# EAGLE board CC-16-2 ADIS16209 breakout (EAGLE 9.2.2)
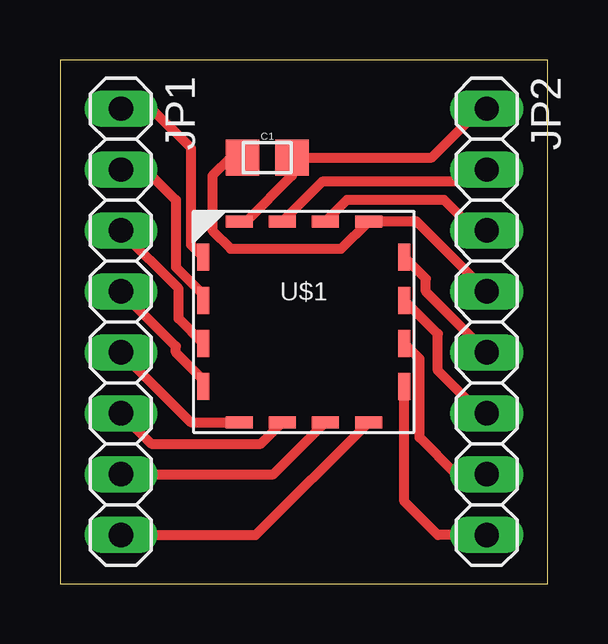
[diagram p0: board, top side]

Size 20.32 x 21.84 mm. Coordinates in mm from the lower left corner, seen from the top.
Outline: 0,0 20.32,0 20.32,21.84 0,21.84 0,0
Copper layers (1*16): Top 0.035mm / dielectric 1.5mm / Bottom 0.035mm
Design rules "default": minimum track width 6mil, minimum drill 0.35mm, track to track 6mil, track to pad 6mil, pad to pad 6mil, via to via 6mil, smd to smd 6mil, copper to edge 40mil, drill to drill 6mil, minimum pad ring 10mil, minimum via ring 8mil, stop-mask expansion 4mil, vias tented up to drill 0mil, thermal gap 10mil

## Footprints (pad centres in the part's own frame; a part is rotated, then mirrored left to right if it is on the bottom)
0805 = smd 1.4 x 1.5: 1 -1.025,0; 2 1.025,0
1X08 = drill 1.016 long: 1 -8.89,0; 2 -6.35,0; 3 -3.81,0; 4 -1.27,0; 5 1.27,0; 6 3.81,0; 7 6.35,0; 8 8.89,0
CC-16-2 = smd 0.5 x 1.127: P$1 -4.186,2.696; P$2 -4.186,0.898; P$3 -4.186,-0.898; P$4 -4.186,-2.696; P$9 4.186,-2.696; P$10 4.186,-0.898; P$11 4.186,0.898; P$12 4.186,2.696 | smd 1.127 x 0.5: P$5 -2.696,-4.186; P$6 -0.898,-4.186; P$7 0.898,-4.186; P$8 2.696,-4.186; P$13 2.696,4.186; P$14 0.898,4.186; P$15 -0.898,4.186; P$16 -2.696,4.186

## Placement (x,y rotation side)
C1  1µF  [0805]  8.64,17.78 0 top
JP1  [1X08]  2.54,10.92 270 top
JP2  [1X08]  17.78,10.92 270 top
U$1  ADIS16209  [CC-16-2]  10.16,10.92 0 top

## Library data of the parts
C1 JP1 JP2 U$1 = HyTechDevices

## Nets
GND: C1.2 JP2.1 U$1.P$16
N$2: JP1.1 U$1.P$1
N$3: JP1.2 U$1.P$2
N$4: JP1.3 U$1.P$3
N$5: JP1.4 U$1.P$4
N$6: JP1.5 U$1.P$5
N$7: JP1.6 U$1.P$6
N$8: JP1.7 U$1.P$7
N$9: JP1.8 U$1.P$8
N$10: JP2.2 U$1.P$15
N$11: JP2.3 U$1.P$14
N$12: C1.1 JP2.4 U$1.P$13
N$13: JP2.5 U$1.P$12
N$14: JP2.6 U$1.P$11
N$15: JP2.7 U$1.P$10
N$16: JP2.8 U$1.P$9

## Tracks (layer width: path | path; a pad name or v marks a point on that pad's centre or on a via)
GND
  Top 0.406: JP2.1 17.53,19.81 15.49,17.78 C1.2 9.66,17.02 7.75,15.11 U$1.P$16
N$2
  Top 0.406: JP1.1 3.81,19.81 5.46,18.16 5.46,14.13 U$1.P$1
N$3
  Top 0.406: JP1.2 3.56,17.27 4.83,16 4.83,13.21 5.97,12.06 U$1.P$2
N$4
  Top 0.406: U$1.P$3 4.94,11.06 4.94,12.3 2.54,14.7 JP1.3
N$5
  Top 0.406: U$1.P$4 5.97,8.5 4.83,9.65 4.83,9.91 JP1.4
N$6
  Top 0.406: JP1.5 5.46,6.74 U$1.P$5
N$7
  Top 0.406: JP1.6 3.81,5.84 8.37,5.84 U$1.P$6
N$8
  Top 0.406: JP1.7 8.89,4.57 U$1.P$7
N$9
  Top 0.406: JP1.8 8.15,2.03 U$1.P$8
N$10
  Top 0.406: JP2.2 17.27,16.76 10.92,16.76 U$1.P$15
N$11
  Top 0.406: U$1.P$14 11.95,16 16,16 17.27,14.73 JP2.3
N$12
  Top 0.406: JP2.4 14.86,15.11 U$1.P$13 11.72,13.97 7.11,13.97 6.35,14.73 6.35,17.02 7.11,17.78 C1.1
N$13
  Top 0.406: JP2.5 15.24,12.19 15.24,12.72 U$1.P$12
N$14
  Top 0.406: JP2.6 17.53,7.11 15.75,8.89 15.75,10.42 U$1.P$11
N$15
  Top 0.406: JP2.7 16.51,4.57 14.99,6.1 14.99,9.38 U$1.P$10
N$16
  Top 0.406: JP2.8 15.75,2.03 14.35,3.43 U$1.P$9

## Text on the board
tDocu: CC-16-2 / ADIS16209